# Altium PCB front_flex_dev_board.PcbDoc
Units mm, origin at the board's own origin, x right, y up, seen from the top; angles counter-clockwise.
Board outline 37.08 x 21.59 mm, 2 copper layers (Top Layer, Bottom Layer); 27 components, 36 nets, 120 pads, 45 vias.
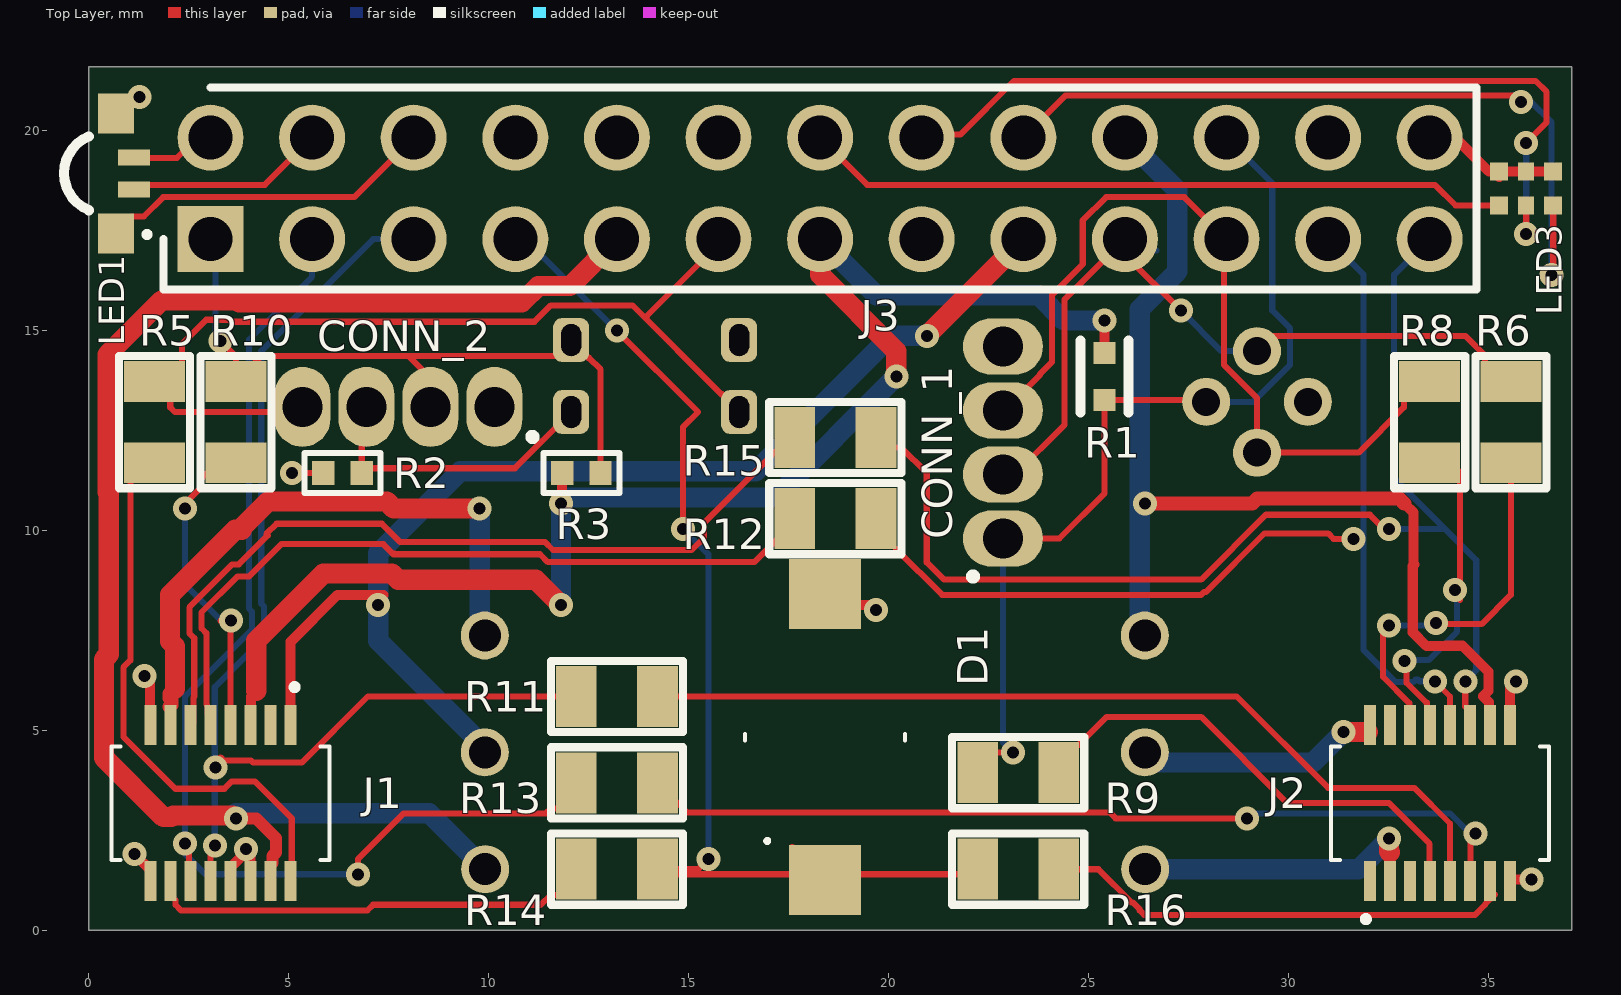
[diagram p0: Top Layer view]
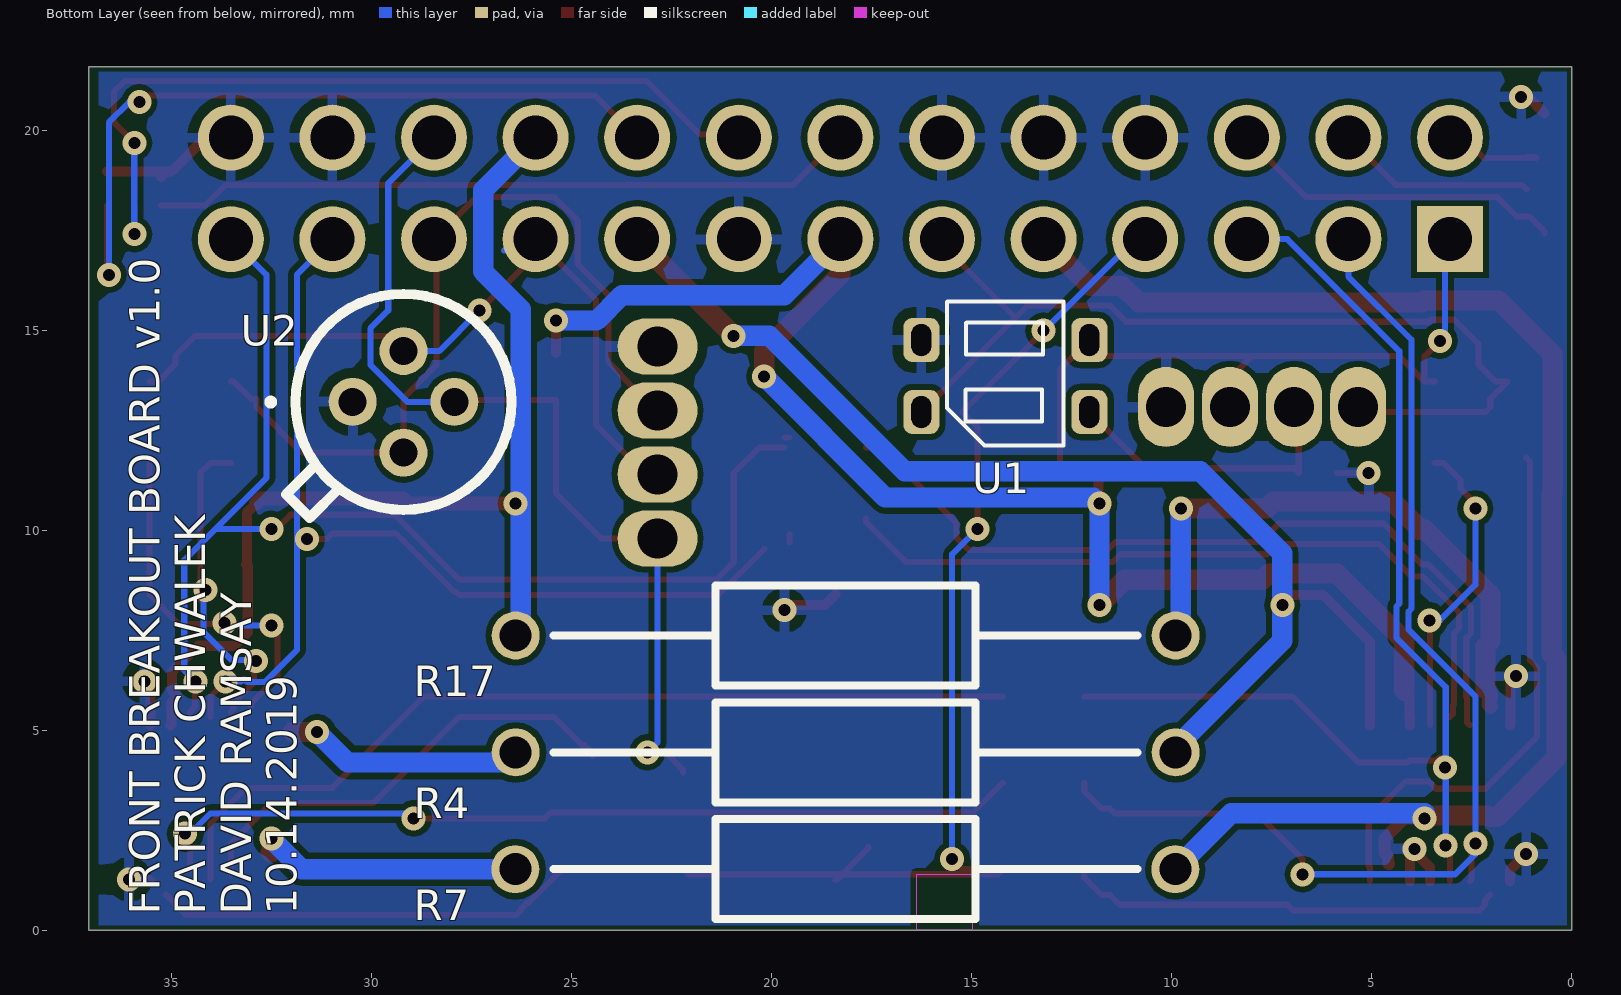
[diagram p1: Bottom Layer view, seen from below]
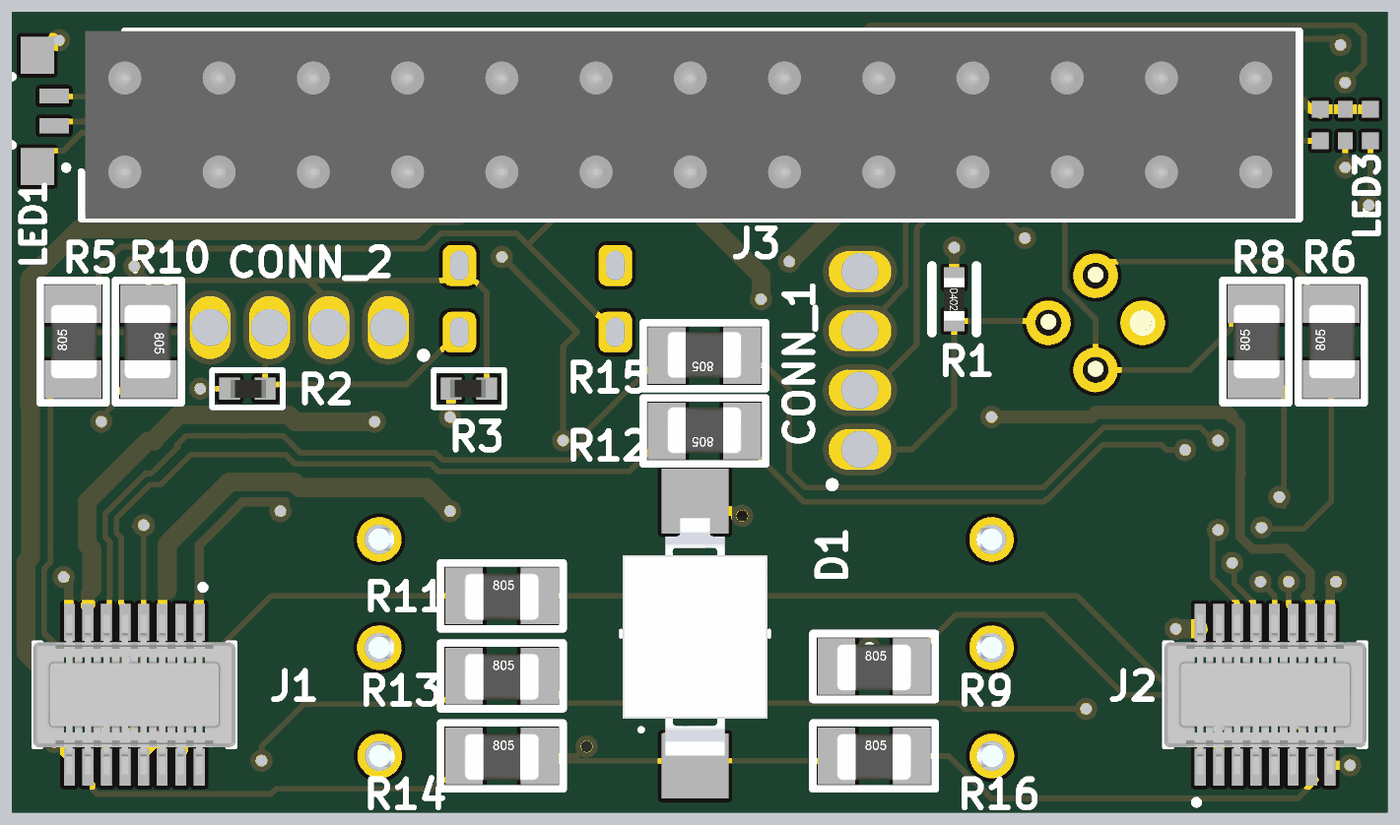
[diagram p2: 3D render of the assembled board from above, using the file's embedded part models]
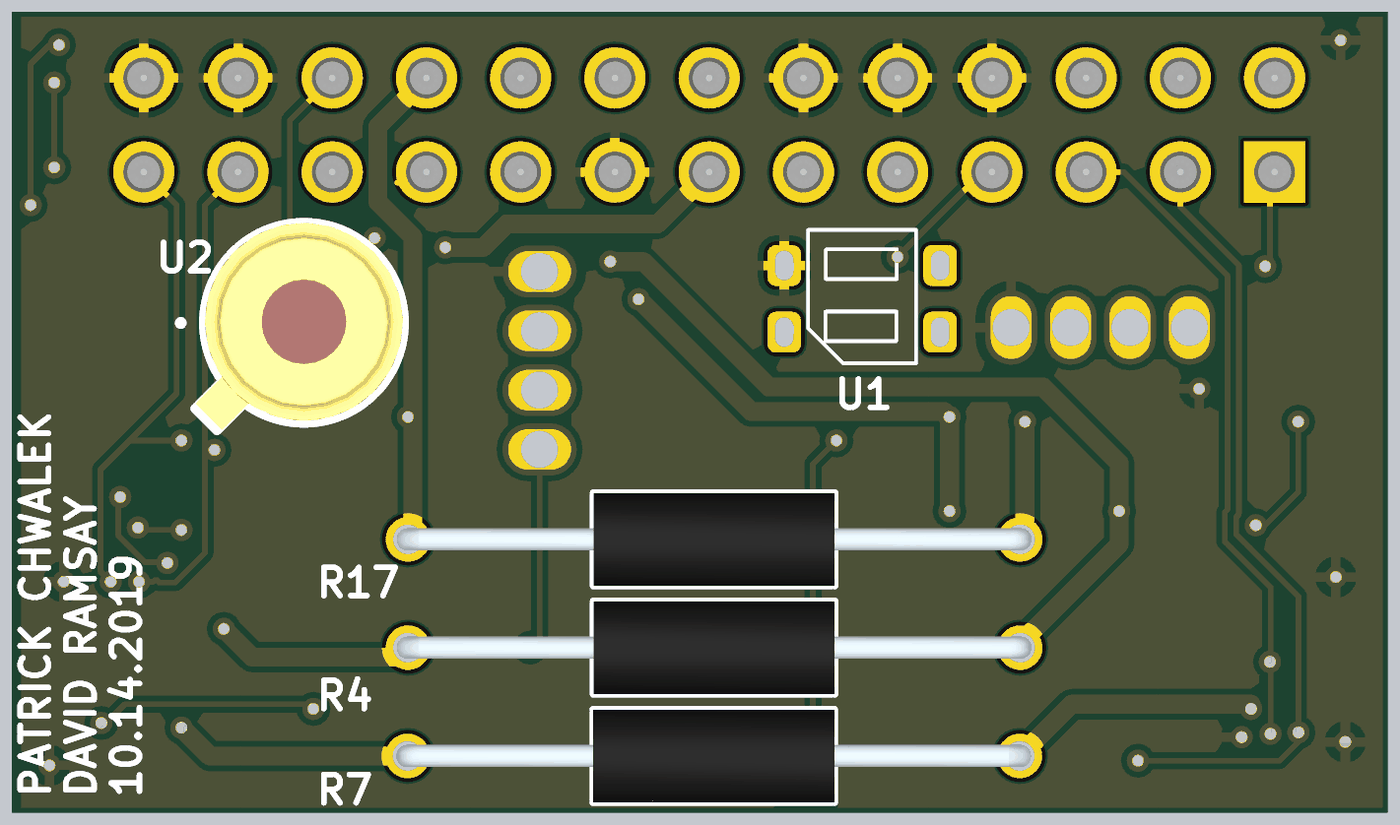
[diagram p3: 3D render of the assembled board from below, using the file's embedded part models]

## Layer stack, top to bottom
Top Solder: solder mask 0.0102, Solder Resist, Dk 3.5
Top Layer: signal copper 0.0356
Dielectric 1: dielectric 0.32, FR-4, Dk 4.8
Bottom Layer: signal copper 0.0356
Bottom Solder: solder mask 0.0102, Solder Resist, Dk 3.5

## Board outline
0,0 37.084,0 37.084,21.59 0,21.59

## Design rules (kind name [scope] priority, off if disabled: settings)
Clearance [All] p1: gap=0.152 ignorepadtopadclearanceinfootprint=FALSE except(0: Arc-Hole Track-Hole SMDPad-Hole THPad-Hole Via-Hole Fill-Hole Poly-Hole Region-Hole Text-Hole)
PolygonConnect [All] p1: connectstyle=Relief reliefconductorwidth=0.254 reliefentries=4 polygonreliefangle="90 Angle" airgapwidth=0.254
RoutingVias [All] p1: holewidth=0.25 width=0.5 viastyle="Through Hole" minholewidth=0.2 minwidth=0.4 maxholewidth=0.3 maxwidth=0.6
SolderMaskExpansion [All] p1: expansion=0.102
Width PWR [InNet('GND')   OR InNet('5V')OR InNet('BATTERY_1')OR InNet('3.3V') OR InNet('VBAT')] p1: maxlimit=0.508 minlimit=0.254 preferedwidth=0.254 minimp=50.000000 maximp=50.000000 favimp=50.000000
Width [All] p2: maxlimit=0.508 minlimit=0.152 preferedwidth=0.152 minimp=50.000000 maximp=50.000000 favimp=50.000000
30 further rules are at their usual default settings.

## Classes and differential pairs
component class Sch_led: IC1 IC2 J1 J2 J3 LED1 LED3 LED4 LED5 LED6 R4 R5 R6 R7 R8 R9 R10 R11 R12 R13 R14 R15 R16 R17
component class Sch_front: CONN_1 CONN_2 D1 R1 R2 R3 U1 U2

## Components (designator, comment, footprint, x,y, rotation, side; value= is the part's Value field where it differs from the comment)
CONN_1 "THERMO" 4_pos_1mm_header 22.86,12.192 r90 top
CONN_2 "BLINK" 4_pos_1mm_header 7.747,13.081 r180 top
D1 "VBPW34FASR" VBPW34FAS 18.415,4.826 r90 top
J1 "55560-0168" 555600168 3.302,3.175 r180 top
J2 "55560-0168" 555600168 33.782,3.175 r0 top
J3 "1-103542-2" HDRV26W89P254X254_2X13_3261X506X1074P 3.048,17.275 r0 top
LED1 "APFA3010SEKJ3ZGKQBKC" KPFA-3010RGBC-11 0.889,18.923 r270 top
LED3 "SMLP36RGB2W3R" ROHM-1510-(0604) 35.941,18.542 r0 top
R1 "100k" SMD-0402-RES 25.4,13.843 r180 top
R2 "100" 0402R 6.35,11.43 r0 top
R3 "50K" 0402R 12.319,11.43 r180 top
R4 ".440" RESAD1650W60L650D250 26.406,4.445 r180 bottom
R5 "0.75" SMD-0805-RES 1.651,12.7 r0 top
R6 "0.75" SMD-0805-RES 35.56,12.7 r0 top
R7 ".440" RESAD1650W60L650D250 9.916,1.524 r0 bottom
R8 "0.75" SMD-0805-RES 33.528,12.7 r0 top
R9 "0.75" SMD-0805-RES 23.241,3.937 r270 top
R10 "0.75" SMD-0805-RES 3.683,12.7 r180 top
R11 "1.47" SMD-0805-RES 13.208,5.842 r270 top
R12 "1.47" SMD-0805-RES 18.669,10.287 r90 top
R13 "1.47" SMD-0805-RES 13.208,3.683 r270 top
R14 "0.75" SMD-0805-RES 13.208,1.524 r270 top
R15 "1.47" SMD-0805-RES 18.669,12.319 r90 top
R16 "0.75" SMD-0805-RES 23.241,1.524 r270 top
R17 ".440" RESAD1650W60L650D250 26.406,7.366 r180 bottom
U1 "QRE1113" QRE1113_DIP 16.265,14.754 r270 bottom
U2 "ZTP-135SR" ZTP-135SR 29.21,13.208 r90 bottom

## Footprints (in the part's own frame and the unit in brackets; to place one, negate y for a bottom-side part, rotate by r counter-clockwise, add the part's x,y. Pads: shape width x height; smd on the part's side, far side on the other; paste and mask are expansions set on the pad)
4_pos_1mm_header [mm]
  oval 1.4x2 hole 1 mask-0.15: 1(-2.4,0) 2(-0.8,0) 3(0.8,0) 4(2.4,0)
  silkscreen extent -3.4,0.7 -3.3,0.8
0402R [mm]
  rect 0.559x0.6 smd: 1(-0.48,0) 2(0.48,0)
  silkscreen extent -0.95,-0.5 0.95,0.5, body extent -0.46,-0.25 0.5,0.25, height 0.3
555600168 [mm]
  rect 0.3x1 smd: 1(-1.75,-1.95) 2(-1.75,1.95) 3(-1.25,-1.95) 4(-1.25,1.95) 5(-0.75,-1.95) 6(-0.75,1.95) 7(-0.25,-1.95) 8(-0.25,1.95) 9(0.25,-1.95) 10(0.25,1.95) 11(0.75,-1.95) 12(0.75,1.95) 13(1.25,-1.95) 14(1.25,1.95) 15(1.75,-1.95) 16(1.75,1.95)
  silkscreen extent -2.73,-2.95 2.73,1.42, body extent -2.72,-2.15 2.73,2.15, height 1.16
HDRV26W89P254X254_2X13_3261X506X1074P [mm]
  rect 1.65x1.65 hole 1.1: 1(0,0)
  round 1.65 hole 1.1: 2(0,2.537) 3(2.54,0) 4(2.54,2.537) 5(5.08,0) 6(5.08,2.537) 7(7.62,0) 8(7.62,2.537) 9(10.16,0) 10(10.16,2.537) 11(12.7,0) 12(12.7,2.537) 13(15.24,0) 14(15.24,2.537) 15(17.78,0) 16(17.78,2.537) 17(20.32,0) 18(20.32,2.537) 19(22.86,0) 20(22.86,2.537) 21(25.4,0) 22(25.4,2.537) 23(27.94,0) 24(27.94,2.537) 25(30.48,0) 26(30.48,2.537)
  silkscreen extent -1.17,-1.26 31.65,3.8, body extent -1.07,-1.26 31.55,3.8, height 10.74
KPFA-3010RGBC-11 [mm]
  rect 1x0.9 smd: 1(1.5,-0.2) 2(-1.5,-0.2)
  rect 0.4x0.8 smd: 3(-0.4,0.25) 4(0.4,0.25)
  silkscreen extent -0.92,-1.5 1.54,0.59
QRE1113_DIP [mm] "QRE1113 IR PHOTODIODE/TRANSISTOR PAIR"
  rrect50% 1.1x0.9 hole 0.5 slot 0.8 at 0 deg: 1(1.8,0) 2(1.8,4.2) 3(0,4.2) 4(0,0)
  silkscreen extent -0.96,0.65 2.64,3.55
RESAD1650W60L650D250 [mm]
  round 1.2 hole 0.8: 1(0,0) 2(16.5,0)
  silkscreen extent 0.95,-1.25 15.55,1.25, body extent -0.3,-1.25 16.8,1.25, height 2.49
ROHM-1510-(0604) [mm]
  rect 0.45x0.45 smd: 1(-0.675,-0.425) 3(0.675,-0.425) 4(0.675,0.425) 6(-0.675,0.425)
  rect 0.4x0.45 smd: 2(0,-0.425) 5(0,0.425)
SMD-0402-RES [mm]
  rect 0.55x0.55 smd: 1(0,0.584) 2(0,-0.584)
  silkscreen extent -0.6,-0.9 0.6,0.9, body extent -0.28,-0.57 0.27,0.58, height 0.41
SMD-0805-RES [mil]
  rect 60x40 smd: 1(0,40) 2(0,-40)
  silkscreen extent -35,-65 35,65, body extent -24,-39 26,39, height 31
VBPW34FAS [mm] "IR Photodiode SMD (Vive)"
  rect 1.75x1.8 smd: 1(-3.575,0) 2(3.575,0)
  silkscreen extent -2.65,-2 0.08,2, body extent -3.29,-1.95 3.11,1.95, height 1.48
ZTP-135SR [mm]
  round 1.2 hole 0.7: 1(0,1.27) 2(1.27,0) 3(0,-1.27) 4(-1.27,0)
  silkscreen extent -2.9,-2.7 2.7,3.35, body extent -4.43,-3.77 3.8,4.46, height 3.4

## Part data
CONN_1 CONN_2: library part 4_pin_1mm_header
D1: "Diode", Manufacturer_Name=Vishay, Mouser Part Number=782-VBPW34FASR, RS Part Number=7689401, Datasheet Link=https://www.vishay.com/docs/81127/vbpw34fa.pdf, Height=1.3mm, Manufacturer_Part_Number=VBPW34FASR, Mouser Price/Stock=https://www.mouser.com/Search/Refine.aspx?Keyword=782-VBPW34FASR, RS Price/Stock=https://uk.rs-online.com/web/p/products/7689401
J1 J2: "Connector", Manufacturer_Name=Molex, Mouser Part Number=538-55560-0168, RS Part Number=7206558P, Allied_Number=70374726, Allied Price/Stock=https://www.alliedelec.com/molexincorporated-55560-0168/70374726/, Datasheet Link=https://www.molex.com/pdm_docs/sd/555600168_sd.pdf, Height=1.15mm, Manufacturer_Part_Number=55560-0168, Mouser Price/Stock=https://www.mouser.com/Search/Refine.aspx?Keyword=538-55560-0168, RS Price/Stock=http://uk.rs-online.com/web/p/products/7206558P
J3: "Connector", Manufacturer_Name="TE Connectivity", Mouser Part Number=571-1-103542-2, Datasheet Link=http://www.te.com/commerce/DocumentDelivery/DDEController?Action=showdoc&DocId=Customer+Drawing%7F103542%7FJ3%7Fpdf%7FEnglish%7FENG_CD_103542_J3.pdf%7F1-103542-2, Height=10.744mm, Manufacturer_Part_Number=1-103542-2, Mouser Price/Stock=https://www.mouser.com/Search/Refine.aspx?Keyword=571-1-103542-2
LED1: "LED", Manufacturer_Name=Kingbright, Mouser Part Number=604-APFA3010SEKJ3ZGK, Allied_Number=70820377, Allied Price/Stock=https://www.alliedelec.com/kingbright-apfa3010sekj3zgkqbkc/70820377/, Datasheet Link=http://www.kingbrightusa.com/images/catalog/SPEC/APFA3010SEKJ3ZGKQBKC.pdf, Manufacturer_Part_Number=APFA3010SEKJ3ZGKQBKC, Mouser Price/Stock=https://www.mouser.com/Search/Refine.aspx?Keyword=604-APFA3010SEKJ3ZGK
LED3: "LED", Manufacturer_Name="ROHM Semiconductor", Mouser Part Number=755-SMLP36RGB2W3R, RS Part Number=1246884, Datasheet Link=http://www.rohm.com/web/global/datasheet/SMLP36RGB2W(R), Manufacturer_Part_Number=SMLP36RGB2W3R, Mouser Price/Stock=https://www.mouser.com/Search/Refine.aspx?Keyword=755-SMLP36RGB2W3R, RS Price/Stock=https://uk.rs-online.com/web/p/products/1246884
R1: library part ERJ-2GEJ104X, "RES SMD 100K OHM 5% 1/10W 0402", Digi-Key Part Number=P100KJCT-ND, Manufacturer="Panasonic Electronic Components", Operating Temperature="-55°C ~ 155°C", Package / Case="0402 (1005 Metric)", Power (Watts)="0.1W, 1/10W", Supplier Device Package=0402, Temperature Coefficient=±200ppm/°C, Tolerance=±5%, @ qty=1500, Composition="Thick Film", Datasheets=http://industrial.panasonic.com/www-cgi/jvcr13pz.cgi?E+PZ+3+AOA0001+ERJ2GEJ104X+7+WW, Factory Stock=0, Failure Rate=-, Features="Automotive AEC-Q200", Height - Seated (Max)="0.016\" (0.40mm)", Image=//media.digikey.com/Photos/Panasonic%20Photos/ERJ-PA2-Series.jpg, Minimum Quantity=1, Number of Terminations=2, Packaging="Cut Tape (CT)", Part Number=ERJ-2GEJ104X, Part Status=Active, Quantity Available=2387986, Series=ERJ, Size / Dimension="0.039\" L x 0.020\" W (1.00mm x 0.50mm)", Unit Price (USD)=0.00350
R2 R3: library part Resistor
R4 R7 R17: library part MRS25000C1000FCT00, "Resistor (MOX1CT52RR43J)", Manufacturer_Name=Vishay, Mouser Part Number=594-MRS25000C1000FCT, Datasheet Link=http://www.vishay.com/docs/28724/mrs16m25.pdf, Manufacturer_Part_Number=MRS25000C1000FCT00, Mouser Price/Stock=https://www.mouser.com/Search/Refine.aspx?Keyword=594-MRS25000C1000FCT
R5 R6 R8 R9 R10 R14 R16: library part ERJ-2GEJ103X, "RES SMD 0.75 OHM 0805", Digi-Key Part Number=P10KJCT-ND, Manufacturer="Panasonic Electronic Components", Operating Temperature="-55°C ~ 155°C", Package / Case="0402 (1005 Metric)", Power (Watts)="0.1W, 1/10W", Supplier Device Package=0805, Temperature Coefficient=±200ppm/°C, Tolerance=±5%, @ qty=1500, Composition="Thick Film", Datasheets=http://industrial.panasonic.com/www-cgi/jvcr13pz.cgi?E+PZ+3+AOA0001+ERJ2GEJ103X+7+WW, Factory Stock=0, Failure Rate=-, Features="Automotive AEC-Q200", Height - Seated (Max)="0.016\" (0.40mm)", Image=//media.digikey.com/Photos/Panasonic%20Photos/ERJ-PA2-Series.jpg, Minimum Quantity=1, Number of Terminations=2, Packaging="Cut Tape (CT)", Part Number=ERJ-2GEJ103X, Part Status=Active, Quantity Available=2560215, Series=ERJ, Size / Dimension="0.039\" L x 0.020\" W (1.00mm x 0.50mm)", Unit Price (USD)=0.00350
R11 R12 R13 R15: library part ERJ-2GEJ103X, "RES SMD 1.47 OHM 0805", Digi-Key Part Number=P10KJCT-ND, Manufacturer="Panasonic Electronic Components", Operating Temperature="-55°C ~ 155°C", Package / Case="0402 (1005 Metric)", Power (Watts)="0.1W, 1/10W", Supplier Device Package=0805, Temperature Coefficient=±200ppm/°C, Tolerance=±5%, @ qty=1500, Composition="Thick Film", Datasheets=http://industrial.panasonic.com/www-cgi/jvcr13pz.cgi?E+PZ+3+AOA0001+ERJ2GEJ103X+7+WW, Factory Stock=0, Failure Rate=-, Features="Automotive AEC-Q200", Height - Seated (Max)="0.016\" (0.40mm)", Image=//media.digikey.com/Photos/Panasonic%20Photos/ERJ-PA2-Series.jpg, Minimum Quantity=1, Number of Terminations=2, Packaging="Cut Tape (CT)", Part Number=ERJ-2GEJ103X, Part Status=Active, Quantity Available=2560215, Series=ERJ, Size / Dimension="0.039\" L x 0.020\" W (1.00mm x 0.50mm)", Unit Price (USD)=0.00350
U1: "IR Emitter and Receiver"
U2: "Undefined or Miscellaneous", Manufacturer_Name="Amphenol Advanced Sensors", Mouser Part Number=527-ZTP-135SR, Allied_Number=70282698, Allied Price/Stock=https://www.alliedelec.com/amphenol-advanced-sensors-ztp-135sr/70282698/, Datasheet Link=https://www.amphenol-sensors.com/en/component/edocman/370-thermopile-ir-sensor-applications/download?Itemid=7967, Manufacturer_Part_Number=ZTP-135SR, Mouser Price/Stock=https://www.mouser.com/Search/Refine.aspx?Keyword=527-ZTP-135SR

## Via types
v1: diameter 0.6, hole 0.3, Top Layer to Bottom Layer, tented both sides, 45 vias

## Nets (pads, with @x,y where several pads share a name; then routed paths per layer and width w, separated by ;. In a path a pad name is that pad's centre, name@x,y a point inside that pad or via, vN(x,y) a via of type N, cw(c..) or ccw(c..) an arc to the next point about the centre after c; other vN are vias at no path point)
3.3V: J1.5 J3.13 R1.2 R3.2 | length 36.8
  Top Layer w0.254: J1.5 4.052,5.322 4.064,5.334 4.064,5.842 4.191,5.969 ; v1(11.811,10.668) 11.839,10.696 R3.2 ; R1.2 v1(25.4,15.24)
  Top Layer w0.508: 4.191,5.989 4.191,7.239 5.867,8.915 7.587,8.915 7.739,8.763 11.176,8.763 v1(11.811,8.128) ; J3.13 18.288,16.383 20.193,14.478 v1(20.193,13.843)
  Bottom Layer w0.508: v1(11.811,8.128) v1(11.811,10.668) 11.959,10.816 17.166,10.816 v1(20.193,13.843) ; J3.13 19.688,15.875 23.749,15.875 24.384,15.24 v1(25.4,15.24)
5V: J2.14 J3.20 R17.1 | length 27.1
  Top Layer w0.254: 32.893,10.668 33.126,10.435 33.126,9.19 ; 33.147,9.144 33.105,9.102 33.105,7.444 33.444,7.105 33.924,7.105 33.932,7.112 34.347,7.112 34.996,6.463 34.996,5.983 34.861,5.848 35.009,5.701 35.009,5.148 J2.14
  Top Layer w0.356: v1(26.406,10.668) 29.092,10.668 29.215,10.791 32.77,10.791 32.893,10.668
  Bottom Layer w0.508: J3.20 27.217,18.503 27.217,16.466 26.279,15.529 26.279,7.493 R17.1
BATTERY_1: J1.4 J3.9 R7.1 | length 36.9
  Top Layer w0.305: v1(3.683,2.794) 4.191,2.794 4.689,2.296 4.689,1.943 4.597,1.851 4.597,1.676 J1.4@4.572,1.651
  Top Layer w0.508: v1(3.683,2.794) 3.61,2.867 2.113,2.867 2.074,2.828 1.871,2.828 0.386,4.313 0.386,6.769 0.508,6.891 0.508,10.922 0.483,10.947 0.483,14.392 1.833,15.743 3.721,15.743 3.771,15.693 10.828,15.693 11.238,16.104 12.037,16.104 J3.9
  Bottom Layer w0.508: v1(3.683,2.794) 3.683,2.921 8.519,2.921 R7.1
BLINK_CATHODE: CONN_2.3 R2.2 U1.2 | length 7.9
  Top Layer w0.152: R2.2 R2.2@6.83,11.451 ; CONN_2.3 6.83,12.964 R2.2@6.83,11.451 ; U1.2 10.659,11.548 6.927,11.548 R2.2@6.83,11.451
  Bottom Layer w0.508: U1.2 12.065,13.23 U1.2@12.085,13.25
BLINK_PWM: CONN_2.4 J3.11 R5.1 U1.1 | length 24.1
  Top Layer w0.152: CONN_2.4@5.347,12.954 2.159,12.954 2.041,13.072 2.041,13.284 1.609,13.716 1.905,13.716 2.337,14.148 2.337,14.656 2.942,15.261 3.521,15.261 3.571,15.211 11.147,15.211 11.557,15.621 13.598,15.621 15.822,13.397 15.841,13.397 16.265,12.973 U1.1 ; CONN_2.4 CONN_2.4@5.728,13.081 ; 13.97,15.367 15.748,17.145 J3.11
BLINK_SIG: CONN_2.2 J3.1 R3.1 R10.2 U1.3 | length 18.4
  Top Layer w0.152: v1(3.302,14.732) 3.683,14.351 R10.2 ; R10.2@3.429,13.716 R10.2 ; CONN_2.2@8.928,12.954 8.928,13.424 8.909,13.443 8.637,13.715 8.001,14.351 ; R3.1 12.799,14.02 12.508,14.311 12.489,14.311 12.065,14.735 U1.3 11.662,14.351 8.001,14.351 ; R10.2 4.318,14.351 8.001,14.351
  Bottom Layer w0.152: J3.1 3.175,17.148 v1@3.175,14.605
EXPANSION_INT: J1.12 J3.3 R13.2 | length 29.1
  Top Layer w0.152: v1@2.287,2.159 2.506,1.939 2.506,1.271 J1.12 ; v1(6.731,1.397) 6.731,1.778 7.874,2.921 11.43,2.921 11.548,3.039 11.76,3.039 12.192,3.471 R13.2
  Bottom Layer w0.152: J3.3 5.588,16.341 4.013,14.766 4.013,8.037 4.085,7.966 4.085,7.514 2.406,5.835 v1(2.406,2.161) 2.406,1.912 2.921,1.397 v1(6.731,1.397)
GND: CONN_1.4 CONN_2.1 D1.2 J1.6 J1.8 J1.15 J1.16 J2.15 J2.16 J3.8 J3.10 J3.12 J3.15 J3.24 J3.26 LED1.2 LED3.4 LED3.5 LED3.6 R2.1 U1.4 U2.1 | length 12.5
  Top Layer w0.152: v1(5.08,11.43) R2.1
  Top Layer w0.254: LED1.2 1.094,20.828 v1(1.27,20.828) ; v1(1.143,1.905) 1.552,1.496 J1.16 ; v1(1.397,6.35) 1.538,6.209 1.538,5.139 J1.15 ; J1.8 3.552,1.575 4.009,2.032 v1(3.937,2.032) ; J1.6 4.047,1.23 4.047,2.015 v1@4.064,2.032 ; D1.2 18.415,8.382 18.669,8.128 19.558,8.128 v1(19.685,8.001) ; J3.26 34.163,19.812 35.008,18.967 LED3.6 35.266,18.836 LED3.6@35.179,18.923 ; LED3.6@35.306,18.967 LED3.5 LED3.4 ; J2.15 35.577,1.27 v1(36.068,1.27) ; J2.16 35.532,6.195 35.56,6.223 v1(35.687,6.223)
  Bottom Layer w0.254: v1(3.937,2.032) 3.976,2.032 v1@3.991,2.047
I2C_SCL: J1.10 J3.5 R11.2 | length 29
  Top Layer w0.152: J1.10 3.052,1.867 3.306,2.121 v1(3.158,2.121) ; v1(3.175,4.064) 3.175,4.191 3.302,4.318 3.378,4.242 4.063,4.242 4.114,4.191 5.334,4.191 6.985,5.842 R11.2
  Bottom Layer w0.152: v1(3.158,2.121) 3.154,2.125 3.154,6.075 4.389,7.31 4.389,8.092 4.318,8.164 4.318,14.478 7.115,17.275 J3.5
I2C_SDA: J2.12 J3.25 R15.2 | length 31.2
  Top Layer w0.152: R15.2@19.558,12.319 R15.2 ; R15.2@19.685,12.065 20.32,12.065 20.955,11.43 20.955,9.195 21.387,8.763 27.813,8.763 29.435,10.385 32.033,10.385 32.385,10.033 v1(32.512,10.033) ; v1(34.417,6.223) 34.417,5.59 34.544,5.463 J2.12@34.544,5.334
  Bottom Layer w0.152: v1(32.512,10.033) 33.909,10.033 ; J3.25 32.639,16.386 32.639,11.303 33.909,10.033 ; v1(34.417,6.223) 34.692,6.498 34.692,9.25 33.909,10.033
IMU_INT: J2.10 J3.23 R12.2 | length 27.4
  Top Layer w0.152: R12.2@19.558,9.694 R12.2@19.558,9.906 ; 20.193,9.526 21.337,8.382 27.813,8.382 27.889,8.458 27.939,8.458 29.399,9.918 30.988,9.918 31.127,9.779 v1(31.623,9.779) ; v1(33.655,6.223) 34.036,5.842 J2.10@34.036,5.334
  Bottom Layer w0.152: J3.23@30.988,16.87 J3.23 31.877,16.386 v1@31.877,9.906 ; v1(31.623,9.779) 31.75,9.779 v1@31.877,9.906 ; v1(33.655,6.223) 33.274,6.223 33.231,6.266 33.176,6.266 33.112,6.202 32.674,6.202 31.877,6.999 v1@31.877,9.906
LED_LEFT_FRONT_B: J3.18 LED3.3 | length 19.7
  Top Layer w0.152: J3.18 24.422,20.866 35.903,20.866 35.941,20.828 v1(35.814,20.701) ; v1(36.576,16.383) 36.616,16.423 LED3.3
  Bottom Layer w0.152: v1(35.814,20.701) 36.068,20.701 36.576,20.193 v1(36.576,16.383)
LED_LEFT_FRONT_G: J3.14 LED3.1 | length 17.7
  Top Layer w0.152: J3.14 19.467,18.633 33.66,18.633 34.176,18.117 LED3.1
LED_LEFT_FRONT_R: J3.16 LED3.2 | length 20.8
  Top Layer w0.152: J3.16 20.903,19.887 21.792,19.887 23.135,21.23 36.174,21.23 36.449,20.955 36.449,20.193 v1(35.941,19.685) ; v1(35.941,17.399) LED3.2
  Bottom Layer w0.152: v1(35.941,17.399) v1(35.941,19.685)
LED_LEFT_SIDE_B: J3.4 LED1.4 | length 5
  Top Layer w0.152: LED1.4 1.249,18.633 4.409,18.633 J3.4
LED_LEFT_SIDE_G: J3.2 LED1.3 | length 2.6
  Top Layer w0.152: LED1.3 0.908,19.323 0.889,19.304 1.139,19.304 2.21,19.304 2.718,19.812 J3.2
LED_LEFT_SIDE_R: J3.6 LED1.1 | length 8.5
  Top Layer w0.152: LED1.1 0.689,17.473 1.063,17.847 1.386,17.847 1.868,18.329 6.645,18.329 J3.6
LH_DIODE_ARRAY: D1.1 J3.7 R14.1 R16.2 | length 28.7
  Top Layer w0.152: v1(13.208,14.986) 15.24,12.954 14.859,12.573 v1(14.859,10.033) ; v1(15.494,1.778) 15.24,1.524 R14.1 14.351,1.397 22.098,1.397 R16.2 ; D1.1@17.591,2.075 17.591,2.05 18.39,1.251 D1.1
  Bottom Layer w0.152: J3.7 10.919,17.275 v1(13.208,14.986) ; v1(14.859,10.033) 14.859,10.066 14.982,9.943 14.982,9.91 15.494,9.398 v1(15.494,1.778)
NetJ1_2: J1.2 R5.2 | length 13.9
  Top Layer w0.152: R5.2@1.143,11.811 1.045,11.713 1.045,6.746 0.868,6.569 0.868,4.835 2.168,3.535 3.394,3.535 3.571,3.712 4.162,3.712 5.08,2.794 5.08,1.603 5.052,1.575 J1.2
NetJ1_7: J1.7 R10.1 | length 8.1
  Top Layer w0.152: v1(2.413,10.541) 2.413,10.668 2.785,11.04 2.785,11.252 3.217,11.684 R10.1@3.429,11.684 ; J1.7 3.552,7.484 3.302,7.734 3.315,7.747 v1(3.556,7.747)
  Bottom Layer w0.152: v1(2.413,10.541) 2.413,8.636 3.302,7.747 v1(3.556,7.747)
NetJ1_9: J1.9 R12.1 | length 18.9
  Top Layer w0.152: J1.9@3.048,5.334 2.978,5.404 2.978,5.606 2.946,5.638 2.946,7.426 2.823,7.549 2.823,7.945 3.718,8.84 4.008,8.84 4.82,9.652 7.366,9.652 7.62,9.398 ; 7.641,9.419 7.662,9.398 11.286,9.398 11.484,9.2 16.642,9.2 17.653,10.211 R12.1
NetJ1_11: J1.11 R15.1 | length 20.6
  Top Layer w0.152: J1.11 2.626,5.199 2.626,5.822 2.642,5.838 2.642,7.3 2.519,7.423 2.519,8.071 3.592,9.145 3.755,9.145 4.481,9.87 ; 4.445,9.906 4.699,10.16 7.331,10.16 7.788,9.703 11.412,9.703 11.61,9.504 15.078,9.504 15.388,9.814 15.388,10.181 17.272,12.065 R15.1@17.653,12.065
NetJ1_13: J1.13 R17.2 | length 15
  Top Layer w0.356: J1.13@2.032,5.588 2.072,5.628 2.072,5.762 2.032,5.802 2.032,5.91 2.159,6.037 ; 3.663,10.013 3.83,10.013
  Top Layer w0.508: 2.159,6.037 2.159,7.1 2.036,7.223 2.036,8.386 3.663,10.013 ; 3.83,10.013 3.81,10.033 4.496,10.719 7.455,10.719 7.632,10.541 v1(9.779,10.541)
  Bottom Layer w0.508: v1(9.779,10.541) 9.779,7.493 R17.2
NetJ1_14: J1.14 R14.2 | length 10.9
  Top Layer w0.152: J1.14@2.032,0.889 2.038,0.889 2.126,0.801 2.126,0.795 2.173,0.748 2.173,0.63 2.307,0.496 6.973,0.496 7.112,0.635 11.303,0.635 11.548,0.88 11.76,0.88 12.192,1.312 R14.2
NetJ2_2: J2.2 R4.1 | length 5.7
  Top Layer w0.508: v1(31.369,4.953) J2.2@31.976,4.953
  Bottom Layer w0.508: R4.1@26.543,4.191 30.607,4.191 v1(31.369,4.953)
NetJ2_3: J2.3 R7.2 | length 6.8
  Top Layer w0.508: v1(32.512,2.286) 32.512,1.97 32.532,1.95
  Bottom Layer w0.508: R7.2 31.75,1.524 v1(32.512,2.286)
NetJ2_6: J2.6 R6.2 | length 9.2
  Top Layer w0.152: v1(32.512,7.62) 32.364,7.472 32.364,6.329 33.02,5.673 J2.6@33.02,5.588 ; v1(33.684,7.684) 33.719,7.649 34.827,7.649 35.56,8.382 R6.2
  Bottom Layer w0.152: v1(32.512,7.62) 33.655,7.62 v1@33.782,7.747
NetJ2_7: J2.7 R9.1 | length 11.6
  Top Layer w0.152: R9.1@24.473,4.356 24.473,4.407 24.689,4.623 24.74,4.623 25.451,5.334 27.813,5.334 29.972,3.175 32.512,3.175 33.528,2.159 J2.7@33.528,1.397
NetJ2_8: J2.8 R8.2 | length 8.6
  Top Layer w0.152: v1(32.893,6.731) 32.949,6.675 32.949,6.182 33.436,5.694 33.458,5.694 33.458,5.531 J2.8@33.528,5.461 ; R8.2 34.036,11.684 34.29,11.43 34.29,8.255 34.163,8.382 v1(34.163,8.509)
  Bottom Layer w0.152: v1(32.893,6.731) 32.914,6.752 33.5,6.752 34.213,7.465 34.213,8.459 v1(34.163,8.509)
NetJ2_9: J2.9 R11.1 | length 22.5
  Top Layer w0.152: R11.1 28.702,5.842 30.988,3.556 33.147,3.556 34.036,2.667 J2.9@34.036,1.27
NetJ2_11: J2.11 R13.1 | length 22
  Top Layer w0.152: R13.1 14.961,2.946 25.527,2.946 25.679,2.794 v1(28.956,2.794) ; J2.11@34.544,1.524 34.544,2.286 v1(34.671,2.413)
  Bottom Layer w0.152: v1(28.956,2.794) 29.083,2.921 34.036,2.921 34.544,2.413 v1(34.671,2.413)
NetJ2_13: J2.13 R16.1 | length 11.6
  Top Layer w0.152: R16.1 25.244,1.524 26.073,0.695 26.102,0.695 26.289,0.508 ; 26.275,0.494 26.387,0.381 34.661,0.381 34.911,0.63 34.911,0.646 J2.13@35.153,0.889
TP_NOSE: CONN_1.3 J3.21 R8.1 U2.4 | length 20.8
  Top Layer w0.152: CONN_1.3 22.898,12.992 23.784,13.878 23.784,13.903 24.089,14.207 24.089,15.887 24.854,16.652 24.854,17.742 25.441,18.329 27.394,18.329 J3.21 28.381,17.208 28.381,14.135 29.21,13.306 U2.4 31.75,11.938 32.884,13.072 32.884,13.284 33.02,13.284 33.452,13.716 R8.1
TP_NOSE_GND: CONN_1.2 J3.19 R6.1 U2.2 | length 20.2
  Top Layer w0.152: CONN_1.2 23.16,11.392 24.393,12.625 24.393,15.76 J3.19 25.908,16.891 v1(27.305,15.494) ; U2.2@29.083,14.605 U2.2 29.591,14.859 34.417,14.859 34.916,14.36 34.916,14.148 35.348,13.716 R6.1
  Bottom Layer w0.152: J3.19 26.195,16.988 26.7,16.988 ; v1(27.305,15.494) 28.321,14.478 U2.2
TP_THERMISTOR: CONN_1.1 J3.22 R1.1 R9.2 U2.3 | length 23.3
  Top Layer w0.152: R9.2 22.225,4.013 22.657,4.445 v1(23.114,4.445) ; CONN_1.1 24.27,9.792 25.4,10.922 R1.1 27.889,13.259 U2.3
  Bottom Layer w0.152: CONN_1.1 22.86,4.699 v1(23.114,4.445) ; U2.3 29.112,13.208 30.039,14.135 30.039,15.046 29.591,15.494 29.591,18.669 J3.22
VBAT: J1.1 J3.17 R4.2 | length 30.7
  Top Layer w0.254: J1.1 5.052,7.211 6.223,8.382 v1@7.366,8.382
  Top Layer w0.508: v1(20.955,14.859) 20.955,14.862 J3.17
  Bottom Layer w0.508: R4.2@10.043,4.191 10.043,4.435 7.239,7.239 v1(7.239,8.128) 7.239,9.424 9.292,11.477 16.684,11.477 20.066,14.859 v1(20.955,14.859)
pads on no net: J1.3 J2.1 J2.4 J2.5

## Polygon pours and split planes (outlines as drawn)
GND on Bottom Layer "Bottom Layer-GND" (solid, remove dead copper, pour order 0): 0.127,21.463 36.83,21.463 36.83,0.127 0.127,0.127

## Keep-outs
Bottom Layer:
  rectangle: 14.986,0 16.383,1.397

## Silkscreen, mask and mechanical layers (free items; w line width, h text height)
Bottom Overlay:
  text "FRONT BREAKOUT BOARD v1.0 / PATRICK CHWALEK / DAVID RAMSAY / 10.14.2019" at 31.877,0.381 h0.76 r270
Mechanical BO:
  the board outline again, w0.013